# Altium PCB 19-3170105582.PcbDoc (part 1 of 2)
Units mil, origin at the board's own origin, x right, y up, seen from the top; angles counter-clockwise.
Board outline 8600 x 7000 mil, 2 copper layers (Top Layer, Bottom Layer); 186 components, 221 nets, 859 pads, 233 vias.
Unrouted connection lines stored in the file: 26.
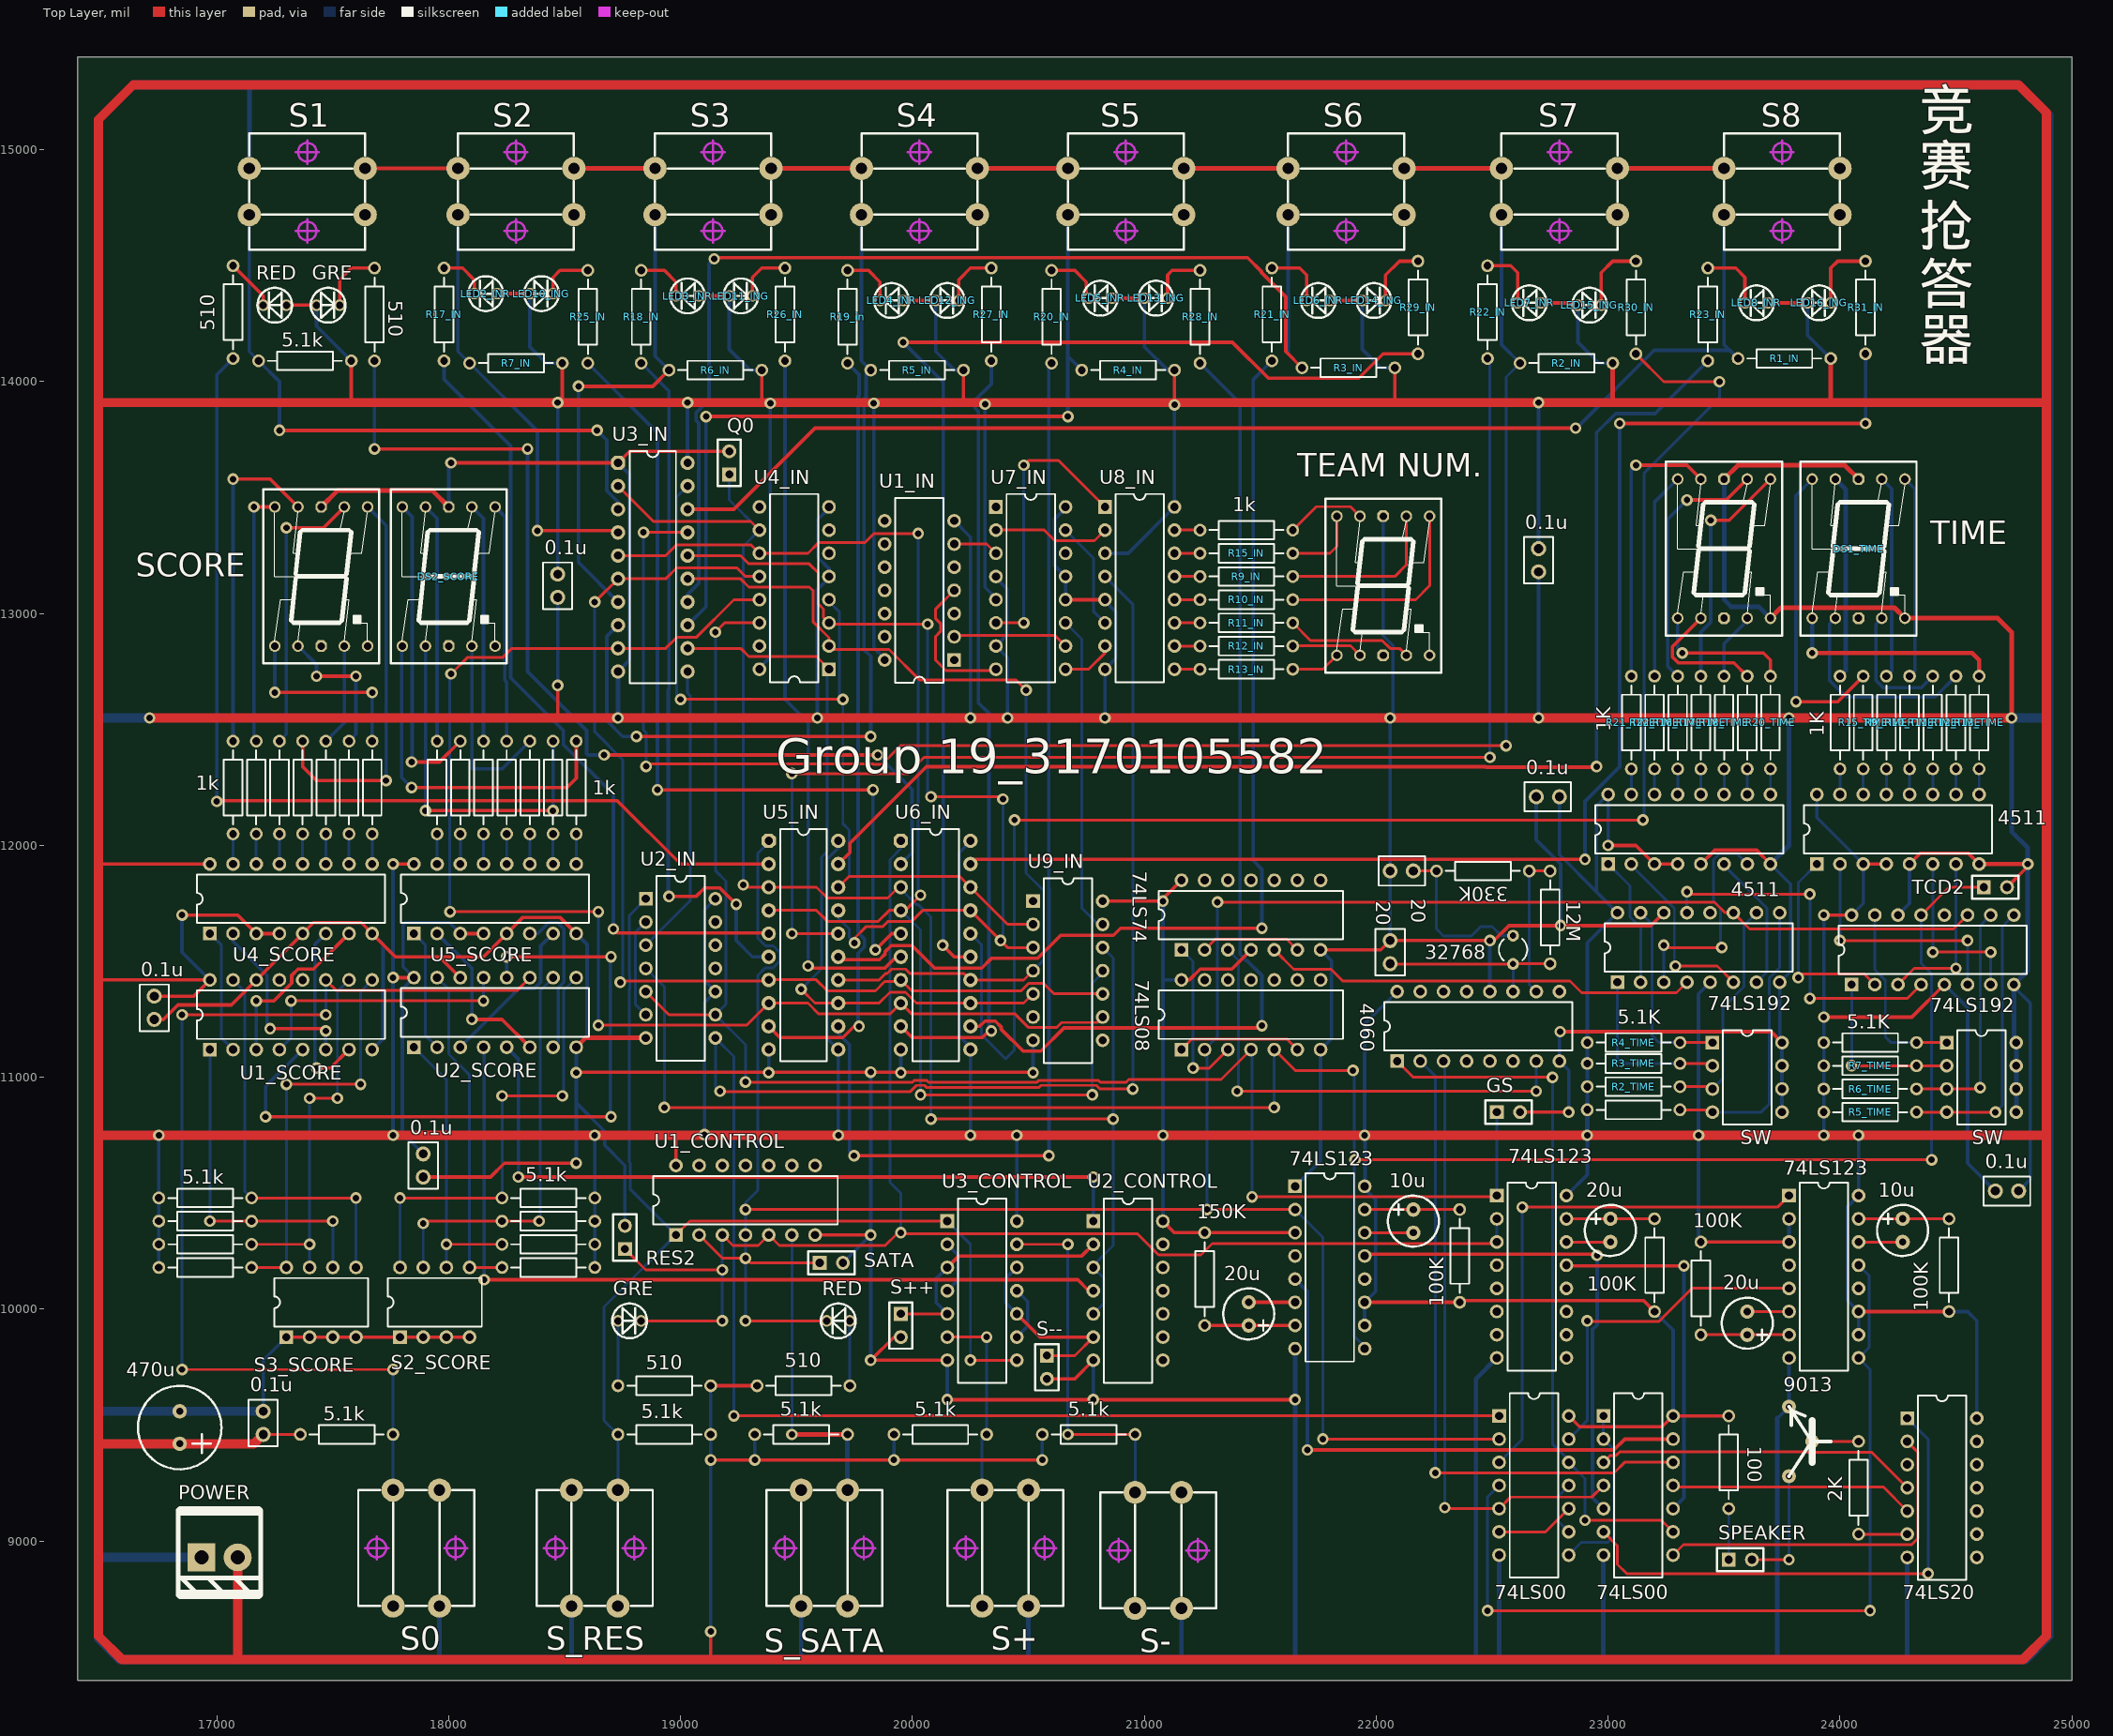
[diagram p0: Top Layer view]
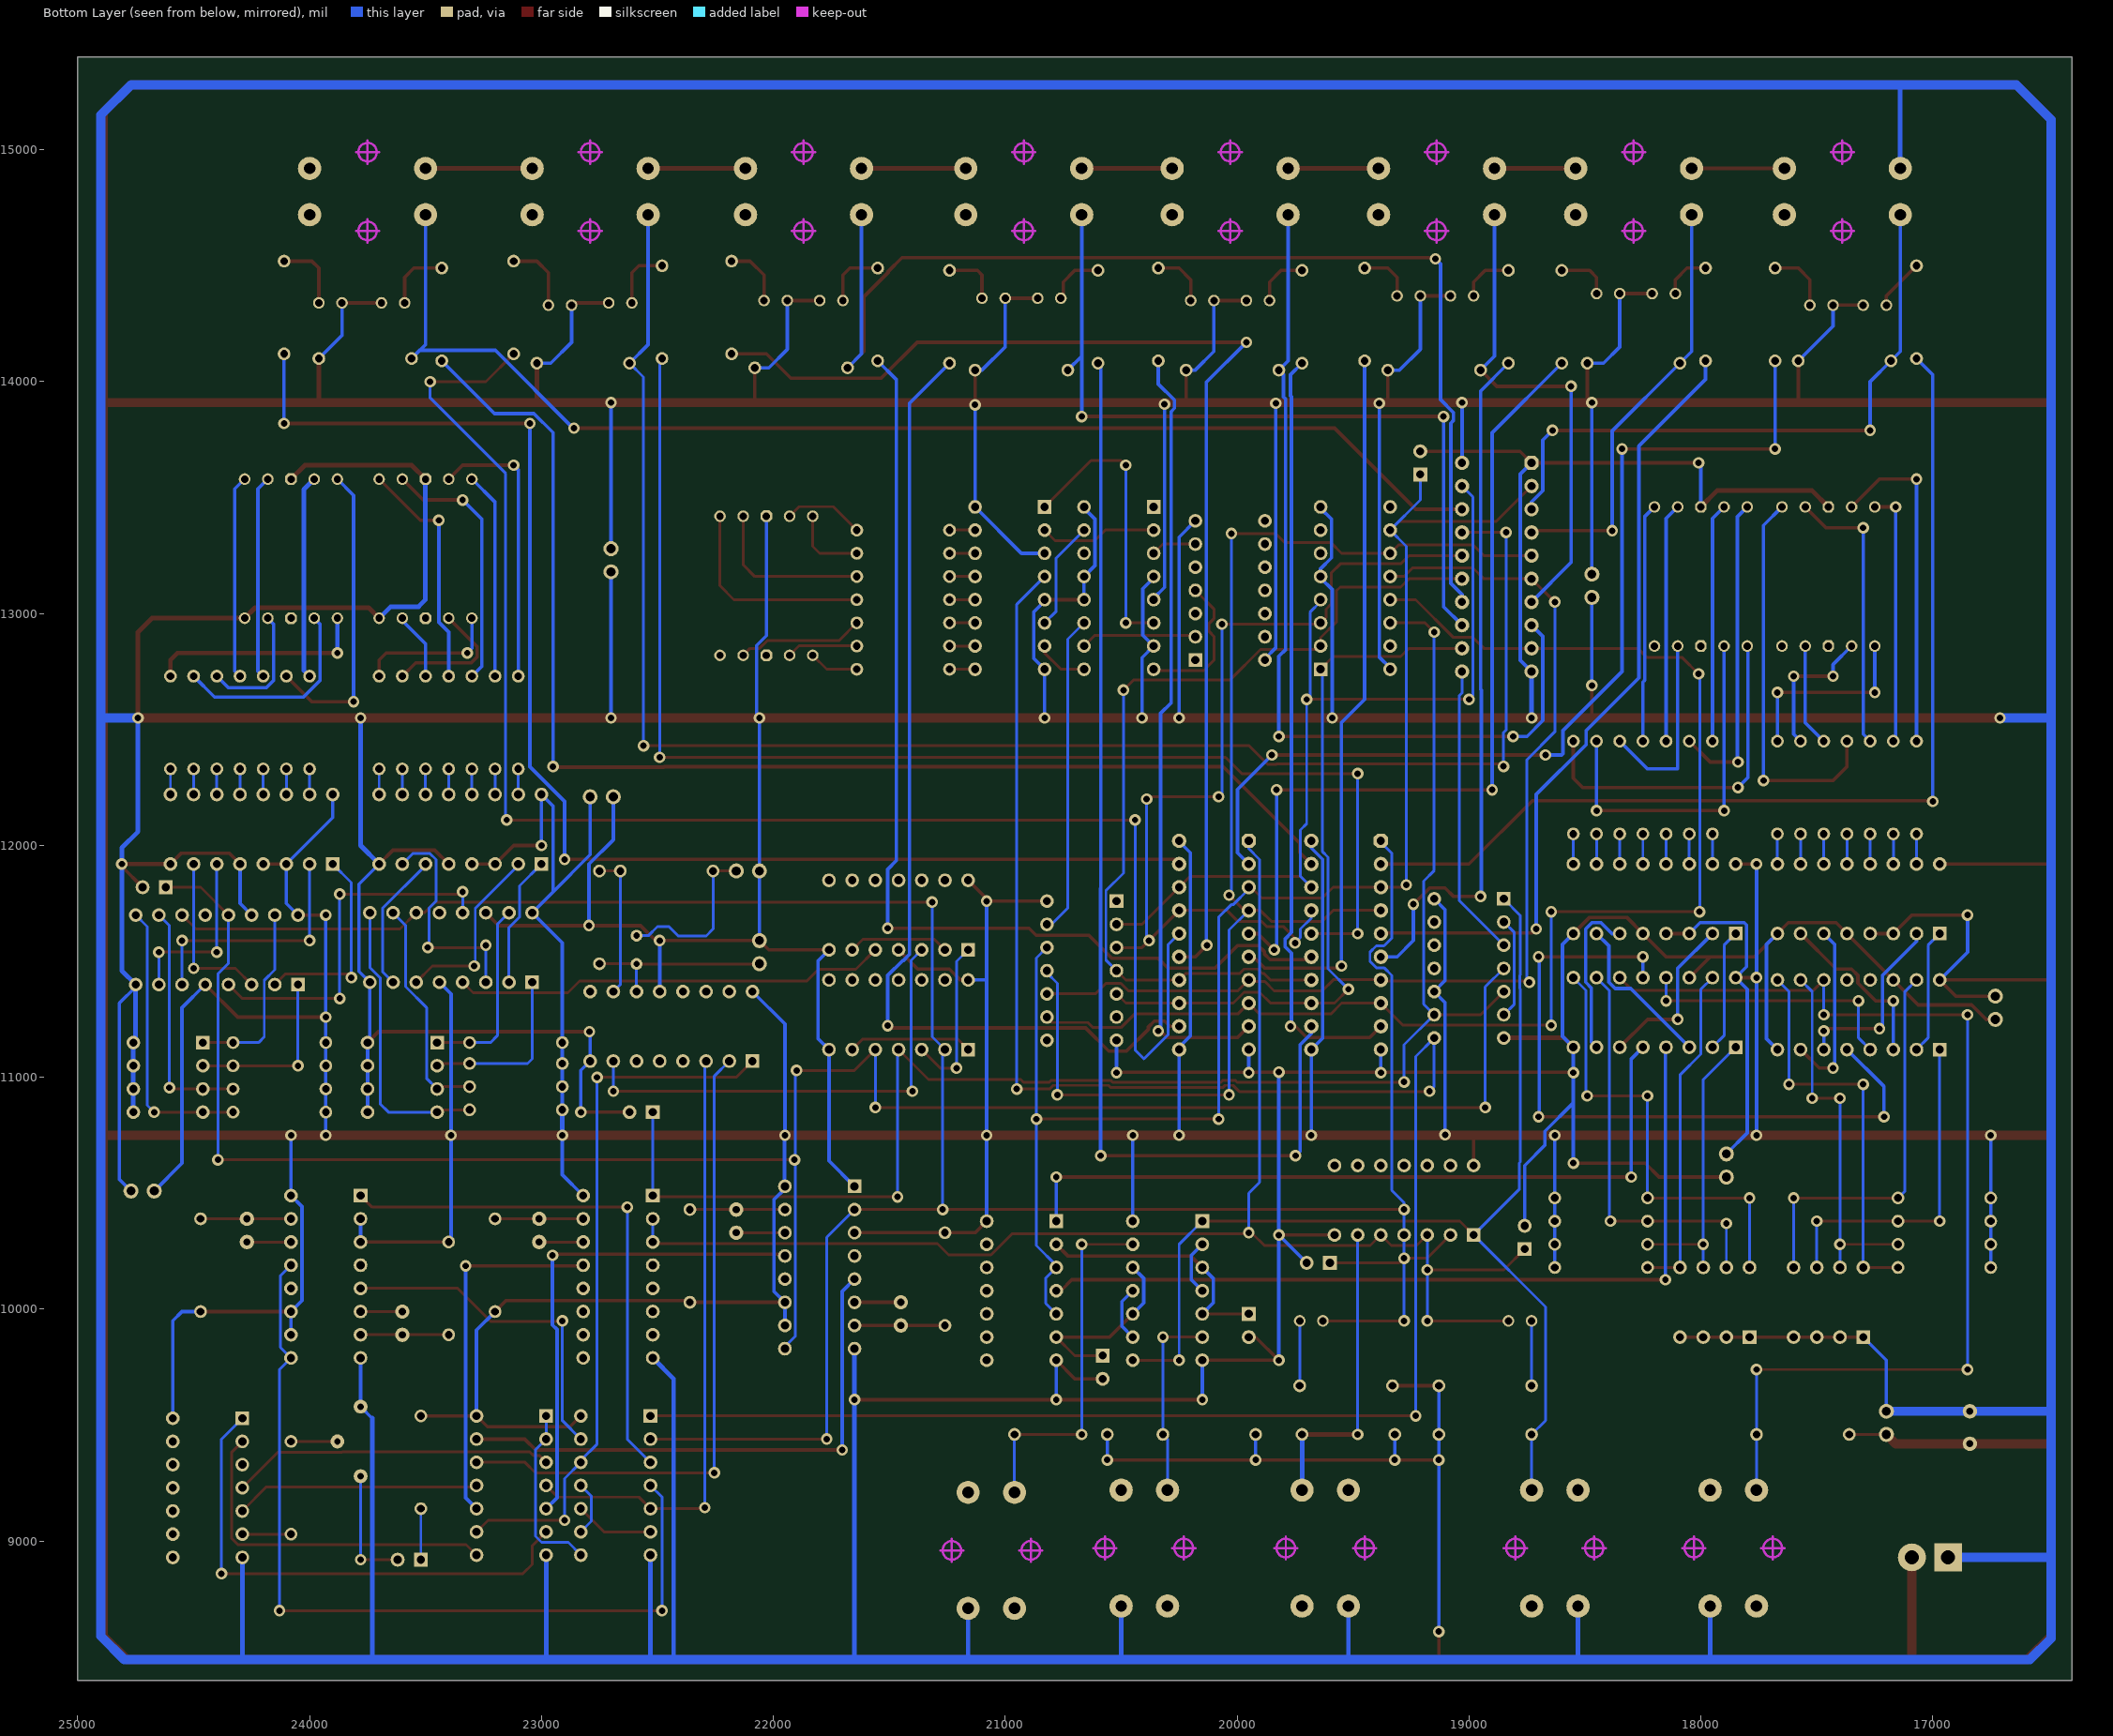
[diagram p1: Bottom Layer view, seen from below]

## Layer stack, top to bottom
Top Layer: signal copper 1.4
Dielectric: dielectric 12.6, FR-4, Dk 4.8
Bottom Layer: signal copper 1.4

## Board outline
16400,15400 25000,15400 25000,8400 16400,8400

## Design rules (kind name [scope] priority, off if disabled: settings)
Clearance [All] p1: gap=10
PolygonConnect [All] p1: connectstyle=Relief reliefconductorwidth=10 reliefentries=4 polygonreliefangle="90 Angle"
RoomDefinition Sheet1 [InComponentClass('Sheet1')] p1: confinementstyle=ConfineIn formatcopy=TRUE lockcomponents=FALSE outline 49640,960 50260,960 50260,1890 49640,1890
RoutingCorners [All] p1: cornerstyle=45-Degree minsetback=30 maxsetback=50
RoutingVias [All] p1: holewidth=28 width=50 viastyle="Through Hole" minholewidth=28 minwidth=50 maxholewidth=28 maxwidth=50
SilkscreenOverComponentPads [All] p1: minsilkscreentomaskgap=10
SolderMaskExpansion [All] p1: expansion=4
TestPointUsage [All] p1: valid=0 allowmultiple=FALSE
Testpoint [All] p1: side=15 testpointundercomponent=TRUE minsize=40 maxsize=100 preferedsize=60 minholesize=0 maxholesize=40 preferedholesize=32 testpointgrid=1 style=1023 order=0123456789
Width [All] p1: maxlimit=200 minlimit=10 preferedwidth=12
22 further rules are at their usual default settings.

## Classes and differential pairs
component class Sheet1: 0.1u 5.1K 5.1k 10u 20 20u 100 100K 150K 470u 510 9013 DS1_TIME DS2_SCORE GRE LED2_INR LED3_INR LED4_INR LED5_INR LED6_INR LED7_INR LED8_INR LED10_ING LED11_ING LED12_ING LED13_ING LED14_ING LED15_ING LED16_ING POWER R1_IN R2_IN R2_TIME R3_IN R3_TIME R4_IN R4_TIME R5_IN R5_TIME R6_IN RED SCORE "Team num." TIME

## Components (designator, comment, footprint, x,y, rotation, side; value= is the part's Value field where it differs from the comment)
0.1u "Cap" VP32-3.2 17200,9510 r270 top (schematic designator C1_POWER)
0.1u "Cap" VP32-3.2 16730,11300 r90 top (schematic designator C1_POWER)
0.1u "Cap" VP32-3.2 17890,10620 r270 top (schematic designator C1_POWER)
0.1u "Cap" VP32-3.2 24720,10510 r0 top (schematic designator C1_POWER)
0.1u "Cap" VP32-3.2 22740,12210 r0 top (schematic designator C1_POWER)
0.1u "Cap" VP32-3.2 22700,13230 r90 top (schematic designator C1_POWER)
0.1u "Cap" VP32-3.2 18470,13120 r90 top (schematic designator C1_POWER)
1k "RES1" AXIAL-0.4 17950,12250 r90 top (schematic designator R25_SCORE)
1k "RES1" AXIAL-0.4 17070,12250 r90 top (schematic designator R18_SCORE)
1k "R" AXIAL-0.4 21440,13360 r0 top (schematic designator R14_IN)
1K "Res2" AXIAL-0.4 24000,12530 r90 top (schematic designator R14_TIME)
1K "Res2" AXIAL-0.4 23600,12530 r90 top (schematic designator R19_TIME)
2K "Res2" AXIAL-0.4 24080,9230 r90 top (schematic designator R7_ALARM)
5.1k "RES1" AXIAL-0.4 16950,10480 r180 top (schematic designator R12_SCORE)
5.1k "RES1" AXIAL-0.4 20760,9460 r0 top (schematic designator R6_CONTROL)
5.1k "RES1" AXIAL-0.4 18430,10480 r0 top (schematic designator R5_SCORE)
5.1k "RES1" AXIAL-0.4 20120,9460 r0 top (schematic designator R5_CONTROL)
5.1k "RES1" AXIAL-0.4 19520,9460 r0 top (schematic designator R4_CONTROL)
5.1k "RES1" AXIAL-0.4 18930,9460 r180 top (schematic designator R3_CONTROL)
5.1k "Res2" AXIAL-0.4 17560,9460 r0 top (schematic designator R0)
5.1K "Res2" AXIAL-0.4 23110,10860 r180 top (schematic designator R1_TIME)
5.1k "R" AXIAL-0.4 17380,14090 r0 top (schematic designator R8_IN)
5.1K "Res2" AXIAL-0.4 24130,11150 r180 top (schematic designator R8_TIME)
10u "Cap Pol1" RB.2/.1 24270,10390 r270 top (schematic designator C1_ALARM)
10u "Cap Pol1" RB.2/.1 22160,10430 r270 top (schematic designator C3)
12M "Res2" AXIAL-0.4 22750,11690 r90 top (schematic designator R23_TIME)
20 "Cap" VP32-3.2 22110,11890 r180 top (schematic designator C1_TIME)
20 "Cap" VP32-3.2 22060,11540 r90 top (schematic designator C2_TIME)
20u "Cap Pol1" RB.2/.1 23600,9890 r90 top (schematic designator C2_ALARM)
20u "Cap Pol1" RB.2/.1 23010,10390 r270 top (schematic designator C4)
20u "Cap Pol1" RB.2/.1 21450,9930 r90 top (schematic designator C5_ALARM)
74LS00 "74LS00" DIP-14 22680,9240 r270 top (schematic designator U1_ALARM)
74LS00 "74LS00" DIP-14 23130,9240 r270 top (schematic designator U2_ALARM)
74LS08 "74LS08" DIP-14 21460,11270 r0 top (schematic designator U6_TIME)
74LS20 "74LS20" DIP-14 24440,9230 r270 top (schematic designator U6_ALARM)
74LS74 "74LS74" DIP-14 21460,11700 r0 top (schematic designator U7_TIME)
74LS123 "74LS123" DIP-16 23930,10140 r270 top (schematic designator U3_ALARM)
74LS123 "74LS123" DIP-16 21800,10180 r270 top (schematic designator U4_ALARM)
74LS123 "74LS123" DIP-16 22670,10140 r270 top (schematic designator U5_ALARM)
74LS192 "74LS192" DIP-16 24400,11550 r0 top (schematic designator U1_TIME)
74LS192 "74LS192" DIP-16 23390,11560 r0 top (schematic designator U3_TIME)
100 "Res2" AXIAL-0.4 23520,9340 r90 top (schematic designator R6_ALARM)
100K "Res2" AXIAL-0.4 24470,10190 r270 top (schematic designator R1_ALARM)
100K "Res2" AXIAL-0.4 23400,10090 r90 top (schematic designator R2_ALARM)
100K "Res2" AXIAL-0.4 22360,10230 r270 top (schematic designator R3_ALARM)
100K "Res2" AXIAL-0.4 23200,10190 r270 top (schematic designator R4_ALARM)
150K "Res2" AXIAL-0.4 21260,10130 r270 top (schematic designator R5_ALARM)
330K "Res2" AXIAL-0.4 22460,11890 r180 top (schematic designator R24_TIME)
470u "Cap Pol1" RB.4/.14(220U) 16840,9420 r90 top (schematic designator C2_POWER)
510 "RES1" AXIAL-0.4 19530,9670 r0 top (schematic designator R2_CONTROL)
510 "RES1" AXIAL-0.4 18930,9670 r180 top (schematic designator R1_CONTROL)
510 "R" AXIAL-0.4 17070,14300 r90 top (schematic designator R16_IN)
510 "R" AXIAL-0.4 17680,14290 r90 top (schematic designator R24_IN)
4060 "4060" DIP-16 22440,11220 r0 top (schematic designator U5_TIME)
4511 "4511" DIP-16 24250,12070 r0 top (schematic designator U2_TIME)
4511 "4511" DIP-16 23350,12070 r0 top (schematic designator U4_TIME)
9013 "NPNLXH" NPN-2 23780,9580 r180 top (schematic designator Q1_ALARM)
32768 "XTAL" R38 22590,11550 r180 top (schematic designator Y1_TIME)
DS1_TIME "DSY" 8-.5 24080,13580 r0 top
DS2_SCORE "DSY" 8-.5 18000,13460 r0 top
GRE "Component_1" LEDLXH-3 17430,14330 r90 top (schematic designator LED9_ING)
GRE "Component_1" LEDLXH-3 18730,9950 r90 top (schematic designator LEDGREEN_CONTROL)
GS "Comment" SIP-2 22520,10850 r0 top
LED2_INR "Component_1" LEDLXH-3 18210,14380 r270 top
LED3_INR "Component_1" LEDLXH-3 19080,14370 r270 top
LED4_INR "Component_1" LEDLXH-3 19960,14350 r270 top
LED5_INR "Component_1" LEDLXH-3 20860,14360 r270 top
LED6_INR "Component_1" LEDLXH-3 21800,14350 r270 top
LED7_INR "Component_1" LEDLXH-3 22710,14340 r270 top
LED8_INR "Component_1" LEDLXH-3 23690,14340 r270 top
LED10_ING "Component_1" LEDLXH-3 18350,14380 r90 top
LED11_ING "Component_1" LEDLXH-3 19210,14370 r90 top
LED12_ING "Component_1" LEDLXH-3 20100,14350 r90 top
LED13_ING "Component_1" LEDLXH-3 21000,14360 r90 top
LED14_ING "Component_1" LEDLXH-3 21940,14350 r90 top
LED15_ING "Component_1" LEDLXH-3 22870,14330 r90 top
LED16_ING "Component_1" LEDLXH-3 23860,14340 r90 top
POWER "5-12V" "POWER PLUG2" 16934,8930 r180 top
Q0 "Comment" SIP-2 19210,13600 r90 top
R1_IN "R" AXIAL-0.4 23760,14100 r0 top
R2_IN "R" AXIAL-0.4 22820,14080 r0 top
R2_TIME "Res2" AXIAL-0.4 23110,10960 r180 top
R3_IN "R" AXIAL-0.4 21880,14060 r0 top
R3_TIME "Res2" AXIAL-0.4 23110,11060 r180 top
R4_IN "R" AXIAL-0.4 20930,14050 r0 top
R4_TIME "Res2" AXIAL-0.4 23110,11150 r180 top
R5_IN "R" AXIAL-0.4 20020,14050 r0 top
R5_TIME "Res2" AXIAL-0.4 24130,10850 r180 top
R6_IN "R" AXIAL-0.4 19150,14050 r0 top
R6_SCORE "RES1" AXIAL-0.4 18430,10380 r0 top
R6_TIME "Res2" AXIAL-0.4 24130,10950 r180 top
R7_IN "R" AXIAL-0.4 18290,14080 r0 top
R7_SCORE "RES1" AXIAL-0.4 18430,10280 r0 top
R7_TIME "Res2" AXIAL-0.4 24130,11050 r180 top
R8_SCORE "RES1" AXIAL-0.4 18430,10180 r0 top
R9_IN "R" AXIAL-0.4 21440,13160 r0 top
R9_SCORE "RES1" AXIAL-0.4 16950,10180 r180 top
R9_TIME "Res2" AXIAL-0.4 24200,12530 r90 top
R10_IN "R" AXIAL-0.4 21440,13060 r0 top
R10_SCORE "RES1" AXIAL-0.4 16950,10280 r180 top
R10_TIME "Res2" AXIAL-0.4 24300,12530 r90 top
R11_IN "R" AXIAL-0.4 21440,12960 r0 top
R11_SCORE "RES1" AXIAL-0.4 16950,10380 r180 top
R11_TIME "Res2" AXIAL-0.4 24400,12530 r90 top
R12_IN "R" AXIAL-0.4 21440,12860 r0 top
R12_TIME "Res2" AXIAL-0.4 24500,12530 r90 top
R13_IN "R" AXIAL-0.4 21440,12760 r0 top
R13_SCORE "RES1" AXIAL-0.4 17270,12250 r90 top
R13_TIME "Res2" AXIAL-0.4 24600,12530 r90 top
R14_SCORE "RES1" AXIAL-0.4 17370,12250 r90 top
R15_IN "R" AXIAL-0.4 21440,13260 r0 top
R15_SCORE "RES1" AXIAL-0.4 17470,12250 r90 top
R15_TIME "Res2" AXIAL-0.4 24100,12530 r90 top
R16_SCORE "RES1" AXIAL-0.4 17570,12250 r90 top
R16_TIME "Res2" AXIAL-0.4 23300,12530 r90 top
R17_IN "R" AXIAL-0.4 17980,14290 r90 top
R17_SCORE "RES1" AXIAL-0.4 17670,12250 r90 top
R17_TIME "Res2" AXIAL-0.4 23400,12530 r90 top
R18_IN "R" AXIAL-0.4 18830,14280 r90 top
R18_TIME "Res2" AXIAL-0.4 23500,12530 r90 top
R19_in "R" AXIAL-0.4 19720,14280 r90 top
R19_SCORE "RES1" AXIAL-0.4 17170,12250 r90 top
R20_IN "R" AXIAL-0.4 20600,14280 r90 top
R20_SCORE "RES1" AXIAL-0.4 18150,12250 r90 top
R20_TIME "Res2" AXIAL-0.4 23700,12530 r90 top
R21_IN "R" AXIAL-0.4 21550,14290 r90 top
R21_SCORE "RES1" AXIAL-0.4 18250,12250 r90 top
R21_TIME "Res2" AXIAL-0.4 23100,12530 r90 top
R22_IN "R" AXIAL-0.4 22480,14300 r90 top
R22_SCORE "RES1" AXIAL-0.4 18350,12250 r90 top
R22_TIME "Res2" AXIAL-0.4 23200,12530 r90 top
R23_IN "R" AXIAL-0.4 23430,14290 r90 top
R23_SCORE "RES1" AXIAL-0.4 18450,12250 r90 top
R24_SCORE "RES1" AXIAL-0.4 18550,12250 r90 top
R25_IN "R" AXIAL-0.4 18600,14280 r90 top
R26_IN "R" AXIAL-0.4 19450,14290 r90 top
R26_SCORE "RES1" AXIAL-0.4 18050,12250 r90 top
R27_IN "R" AXIAL-0.4 20340,14290 r90 top
R28_IN "R" AXIAL-0.4 21240,14280 r90 top
R29_IN "R" AXIAL-0.4 22180,14320 r90 top
R30_IN "R" AXIAL-0.4 23120,14320 r90 top
R31_IN "R" AXIAL-0.4 24110,14320 r90 top
RED "Component_1" LEDLXH-3 17300,14330 r270 top (schematic designator LED1_INR)
RED "Component_1" LEDLXH-3 19730,9950 r270 top (schematic designator LEDRED_CONTROL)
RES2 "Comment" SIP-2 18760,10260 r90 top
S0 "SW-PB" AN-L 17760,8720 r90 top
S1 "SW-PB" AN-L 17140,14920 r0 top
S2 "SW-PB" AN-L 18040,14920 r0 top
S2_SCORE "SW-DIP4" DIP-8 17940,10030 r0 top
S3 "SW-PB" AN-L 18890,14920 r0 top
S3_SCORE "SW-DIP4" DIP-8 17450,10030 r0 top
S4 "SW-PB" AN-L 19780,14920 r0 top
S5 "SW-PB" AN-L 20670,14920 r0 top
S6 "SW-PB" AN-L 21620,14920 r0 top
S7 "SW-PB" AN-L 22540,14920 r0 top
S8 "SW-PB" AN-L 23500,14920 r0 top
S+ "SW-PB" AN-L 20300,8720 r90 top
S++ "Comment" SIP-2 19950,9980 r270 top
S- "SW-PB" AN-L 20960,8710 r90 top
S-- "Comment" SIP-2 20580,9800 r270 top
S_RES "SW-PB" AN-L 18530,8720 r90 top
S_SATA "SW-PB" AN-L 19520,8720 r90 top
SATA "Comment" SIP-2 19600,10200 r0 top
SCORE "DSY" 8-.5 17450,13460 r0 top (schematic designator DS1_SCORE)
SPEAKER "BUZZER" SIP-2 23520,8920 r0 top
SW "SW-DIP4" DIP-8 24610,11000 r270 top (schematic designator S1_TIME)
SW "SW-DIP4" DIP-8 23600,11000 r270 top (schematic designator S2_TIME)
TCD2 "Comment" SIP-2 24620,11820 r0 top
"TEAM NUM." "DSY" 8-.5 22030,13420 r0 top (schematic designator DS1_IN)
TIME "DSY" 8-.5 23500,13580 r0 top (schematic designator DS2_TIME)
U1_CONTROL "4011" DIP-14 19280,10470 r0 top
U1_IN "74LS04" DIP-14 20030,13100 r90 top
U1_SCORE "74LS192" DIP-16 17320,11270 r0 top
U2_CONTROL "74LS02" DIP-14 20930,10080 r270 top
U2_IN "74LS00" DIP-14 19000,11470 r270 top
U2_SCORE "74LS192" DIP-16 18200,11280 r0 top
U3_CONTROL "4011" DIP-14 20300,10080 r270 top
U3_IN "74LS373" DIP-20 18730,13650 r0 top
U4_IN "74LS148" DIP-16 19490,13110 r90 top
U4_SCORE "4511" DIP-16 17320,11770 r0 top
U5_IN "74LS373" DIP-20 19380,12020 r0 top
U5_SCORE "4511" DIP-16 18200,11770 r0 top
U6_IN "74LS373" DIP-20 19950,12020 r0 top
U7_IN "74LS83" DIP-16 20510,13110 r270 top
U8_IN "4511" DIP-16 20980,13110 r270 top
U9_IN "4068" DIP-14 20670,11460 r270 top

## Footprints (in the part's own frame and the unit in brackets; to place one, negate y for a bottom-side part, rotate by r counter-clockwise, add the part's x,y. Pads: shape width x height; smd on the part's side, far side on the other; paste and mask are expansions set on the pad)
8-.5 [mil]
  round 50 hole 32: 1(100,0) 2(200,0) 3(100,-600) 4(-100,-600) 5(-200,-600) 6(-100,0) 7(-200,0) 8(200,-600)
  oct 50x50 hole 32: 9(0,0) 10(0,-600)
  silkscreen extent -250,-675 250,75
AN-L [mil]
  round 100 hole 50: 1(0,0) 1(500,0) 2(0,-200) 2(500,-200)
  Keep-Out Layer circle w10: c250,70 r40
  Keep-Out Layer circle w10: c250,-270 r40
  Keep-Out Layer lines w10: 250,120 250,20 ; 200,70 300,70 ; 250,-220 250,-320 ; 200,-270 300,-270
  silkscreen extent 0,-350 500,150
AXIAL-0.4 [mm] "Resistor; 2 Leads"
  round 1.4 hole 0.85: 1(-5.08,0) 2(5.08,0)
  silkscreen extent -4.06,-1.02 4.06,1.02
DIP-8 [mm] "DIP; 8 Leads; Row Spacing 7.62 mm; Pitch 2.54 mm"
  rect 1.5x1.5 hole 0.9: 1(-3.81,-3.81)
  round 1.5 hole 0.9: 2(-1.27,-3.81) 3(1.27,-3.81) 4(3.81,-3.81) 5(3.81,3.81) 6(1.27,3.81) 7(-1.27,3.81) 8(-3.81,3.81)
  silkscreen extent -5.15,-2.65 5.15,2.65
DIP-14 [mm] "DIP; 14 Leads; Row Spacing 7.62 mm; Pitch 2.54 mm"
  rect 1.5x1.5 hole 0.9: 1(-7.62,-3.81)
  round 1.5 hole 0.9: 2(-5.08,-3.81) 3(-2.54,-3.81) 4(0,-3.81) 5(2.54,-3.81) 6(5.08,-3.81) 7(7.62,-3.81) 8(7.62,3.81) 9(5.08,3.81) 10(2.54,3.81) 11(0,3.81) 12(-2.54,3.81) 13(-5.08,3.81) 14(-7.62,3.81)
  silkscreen extent -10.1,-2.65 10.1,2.65
DIP-16 [mm] "DIP; 16 Leads; Row Spacing 7.62 mm; Pitch 2.54 mm"
  rect 1.5x1.5 hole 0.9: 1(-8.89,-3.81)
  round 1.5 hole 0.9: 2(-6.35,-3.81) 3(-3.81,-3.81) 4(-1.27,-3.81) 5(1.27,-3.81) 6(3.81,-3.81) 7(6.35,-3.81) 8(8.89,-3.81) 9(8.89,3.81) 10(6.35,3.81) 11(3.81,3.81) 12(1.27,3.81) 13(-1.27,3.81) 14(-3.81,3.81) 15(-6.35,3.81) 16(-8.89,3.81)
  silkscreen extent -10.3,-2.65 10.3,2.65
DIP-20 [mil]
  oct 62x62 hole 35: 1(0,0)
  round 62 hole 35: 2(0,-100) 3(0,-200) 4(0,-300) 5(0,-400) 6(0,-500) 7(0,-600) 8(0,-700) 9(0,-800) 10(0,-900) 11(300,-900) 12(300,-800) 13(300,-700) 14(300,-600) 15(300,-500) 16(300,-400) 17(300,-300) 18(300,-200) 19(300,-100) 20(300,0)
  silkscreen extent 50,-950 250,50
LEDLXH-3 [mil]
  round 50 hole 32: 1(0,0) 2(0,-100)
  silkscreen extent -75,-125 75,25
NPN-2 [mil]
  round 60 hole 28: 1(0,0) 2(-100,150) 3(0,300)
  silkscreen extent -180,0 0,300
"POWER PLUG2" [mil]
  rect 120x120 hole 60: 1(0,0)
  round 120 hole 60: 2(-156,0)
  silkscreen extent -255,-204 100,164
R38 [mm] "Crystal, Thru-Hole; 2 Leads; Body 3.1 x 8.2 mm (Dia.xH)"
  round 1.3 hole 0.7: 1(0,1.55) 2(0,-1.55)
  silkscreen extent -1.55,-1.19 1.55,1.17
RB.2/.1 [mil]
  round 62 hole 31: 1(0,0) 2(100,0)
  silkscreen extent -60,-110 160,110
RB.4/.14(220U) [mil]
  round 62 hole 31: 1(0,0) 2(140,0)
  silkscreen extent -110,-180 250,180
SIP-2 [mil]
  rect 60x60 hole 35: 1(0,0)
  round 60 hole 35: 2(100,0)
  silkscreen extent -50,-50 150,50
VP32-3.2 [mm] "Capacitor, Ceramic, Thru-Hole, Dipped Radial; Body 5.1 x 3.2 mm (WxT) Pin Spacing 2.54 mm (typ)"
  round 1.65 hole 1: 1(-1.27,0) 2(1.27,0)
  silkscreen extent -2.55,-1.6 2.55,1.6

## Part data
0.1u 0.1u 0.1u 0.1u 0.1u 0.1u 0.1u 20 20: "Capacitor"
1k 5.1k 510 510 R1_IN R2_IN R3_IN R4_IN R5_IN R6_IN R7_IN R9_IN R10_IN R11_IN R12_IN R13_IN R15_IN R17_IN R18_IN R19_in R20_IN R21_IN R22_IN R23_IN R25_IN R26_IN R27_IN R28_IN R29_IN R30_IN R31_IN: library part Res2, "Resistor"
1K 1K 2K 5.1k 5.1K 5.1K 12M 100 100K 100K 100K 100K 150K 330K R2_TIME R3_TIME R4_TIME R5_TIME R6_TIME R7_TIME R9_TIME R10_TIME R11_TIME R12_TIME R13_TIME R15_TIME R16_TIME R17_TIME R18_TIME R20_TIME R21_TIME R22_TIME: "Resistor"
10u 10u 20u 20u 20u 470u: "Polarized Capacitor (Radial)"
9013: "NPN Transistor"
32768: "Crystal Oscillator"
DS2_SCORE SCORE: library part DPY_7-SEG, "Seven-Segment Display"
POWER: library part "HEADER 2"
S1 S2 S3 S4 S5 S6 S7 S8: "微动开关"
SPEAKER: library part Cap, "Capacitor"
U2_CONTROL: library part 74LS32

## Via types
v1: diameter 50, hole 28, Top Layer to Bottom Layer, 233 vias

## Nets (pads, with @x,y where several pads share a name; then routed paths per layer and width w, separated by ;. In a path a pad name is that pad's centre, name@x,y a point inside that pad or via, vN(x,y) a via of type N, cw(c..) or ccw(c..) an arc to the next point about the centre after c; other vN are vias at no path point)
1KHZ: 74LS00.12@23280,9340 4060.2 | length 2846.6
  Top Layer w12: v1(22254.47,9294.47) 23025.53,9294.47 23071.06,9340 74LS00.12@23280,9340
  Bottom Layer w12: 4060.2@22190,11070 22254.47,11005.53 v1(22254.47,9294.47)
2KHZ: 74LS00.4@22980,9240 74LS00.5@22530,9140 4060.3 | length 2655.6
  Top Layer w12: v1(22295.47,9144.53) 22300,9140 74LS00.5@22530,9140 22580,9190 22930,9190 74LS00.4@22980,9240
  Bottom Layer w12: 4060.3@22290,11070 22295.47,11064.53 v1(22295.47,9144.53)
512HZ: 74LS00.9@23280,9040 74LS00.12@22830,9340 4060.1 | length 3067.7
  Top Layer w12: 4060.1@22090,11070 22160,11000 v1(22760,11000) ; v1(22900,9090) 23230,9090 74LS00.9@23280,9040
  Bottom Layer w12: v1(22760,11000) 22760,9418.94 22830,9348.94 74LS00.12@22830,9340 22900,9270 v1(22900,9090)
AL1: 74LS00.3@22980,9340 74LS20.4 | length 1393.3
  Top Layer w12: 74LS00.3@22980,9340 23009.47,9369.47 23034.47,9369.47 23050.53,9385.53 23859.42,9385.53 23860.95,9384 24136,9384 74LS20.4@24290,9230
AL3: 74LS00.11@23280,9240 74LS20.5 | length 1055.6
  Top Layer w12: 74LS00.11@23280,9240 23286,9234 24186,9234 74LS20.5@24290,9130
BI: 74LS00.1@22530,9540 U2_IN.8 U8_IN.4 | length 9265.9
  Top Layer w12: v1(19170,10940) 19171,10939 19991.02,10939 20017.49,10965.47 20051.46,10965.47 20059.93,10957 20546.1,10957 20554.57,10965.47 20792.51,10965.47 20807.98,10950 v1(20950,10950) ; v1(19230,9540) 74LS00.1@22530,9540
  Bottom Layer w12: v1(19170,10940) 19150,10960 U2_IN.8@19150,11170 19230,11090 v1(19230,9540) ; U8_IN.4@20830,13160 20950,13040 v1(20950,10950)
CLEAR: 5.1k.2@17760,9460 S0.1 U1_SCORE.11 U2_SCORE.11 | length 4654.7
  Top Layer w12: v1(16850,9740) v1(17760,9740) ; v1(16850,11270) v1(17470,11270) ; U1_SCORE.11@17470,11420 17515.53,11374.47 18294.47,11374.47 U2_SCORE.11@18350,11430
  Bottom Layer w12: v1(16850,9740) v1(16850,11270) ; v1(17470,11270) U1_SCORE.11@17470,11420 ; S0.1@17760,8720 S0.1@17761,8721 ; v1(17760,9740) 5.1k.2@17760,9460 S0.1@17760,9220 S0.1@17761,9219
GND: 0.1u.1@16730,11250 0.1u.1@17200,9560 0.1u.1@18470,13070 0.1u.1@22690,12210 0.1u.1@22700,13180 0.1u.2@17890,10570 0.1u.2@24770,10510 20.2 74LS00.7 74LS08.7 74LS20.7 74LS74.7 74LS123.1@21650,10530 74LS123.8 74LS192.8 74LS192.14 470u.2 4060.8 4060.12 4511.5 4511.8 9013.1 "TEAM NUM..9" DS1_TIME.8 DS1_TIME.9 DS2_SCORE.9 GS.2 POWER.1 Q0.2 RES2.2 S0.2 S1.1 S2.1 S2_SCORE.1 S2_SCORE.2 S2_SCORE.3 S2_SCORE.4 S3.1 S3_SCORE.1 S3_SCORE.2 S3_SCORE.3 S3_SCORE.4 S4.1 S5.1 S6.1 S7.1 S8.1 S++.2 S+.2 S--.2 S-.2 S_RES.1 S_SATA.1 SATA.2 SCORE.9 SW.5 SW.6 SW.7 SW.8 TCD2.2 TIME.8 TIME.9 U1_CONTROL.7 U1_IN.7 U1_SCORE.8 U1_SCORE.14 U2_CONTROL.7 U2_IN.7 U2_SCORE.8 U2_SCORE.14 U3_CONTROL.7 U3_IN.1 U3_IN.10 U4_IN.5 U4_IN.8 U4_SCORE.5 U4_SCORE.8 U5_IN.10 U5_SCORE.5 U5_SCORE.8 U6_IN.10 U7_IN.4 U7_IN.7 U7_IN.12 U7_IN.13 U7_IN.16 U8_IN.5 U8_IN.8 U9_IN.7 | length 86099.2
  Top Layer w15: 0.1u.1@16730,11250 16769.9,11250 16832.4,11312.5 17062.5,11312.5 U1_SCORE.14@17170,11420 U4_SCORE.5@17370,11620 17417.03,11667.03 17622.97,11667.03 U4_SCORE.8@17670,11620 17770,11520 17960,11520 ; S3_SCORE.1@17300,9880 S3_SCORE.2@17400,9880 S3_SCORE.3@17500,9880 S3_SCORE.4@17600,9880 S2_SCORE.1@17790,9880 S2_SCORE.2@17890,9880 S2_SCORE.3@17990,9880 S2_SCORE.4@18090,9880 ; S1.1@17640,14920 S2.1@18040,14920 ; 0.1u.2@17890,10570 18180,10570 18240,10630 v1(18550,10630) ; v1(18010,13650) U3_IN.1@18730,13650 18780,13700 Q0.2@19210,13700 ; U2_SCORE.14@18050,11430 17960,11520 ; 18470,12550 v1(18470,12690) ; v1(18550,11020) 18552.5,11022.5 20517.5,11022.5 v1(20520,11020) ; U5_SCORE.8@18550,11620 18480,11690 18320,11690 U5_SCORE.5@18250,11620 18150,11520 17960,11520 ; U1_CONTROL.7@19580,10320 v1(19820,10320) ; S++.2@19950,9880 19920,9880 v1(19820,9780) U3_CONTROL.7@20150,9780 ; v1(20150,9610) v1(21650,9610) ; S--.2@20580,9700 20700,9700 U2_CONTROL.7@20780,9780 ; U7_IN.12@20660,13060 U8_IN.5@20830,13060 ; 74LS74.7@21760,11550 22020,11550 20.2@22060,11590 22508.04,11590 22572.15,11654.11 23184.11,11654.11 74LS192.14@23240,11710 ; GS.2@22620,10850 v1(22830,10850) ; v1(22792.97,11197.03) 22893.3,11197.03 23527.03,11197.03 23702.97,11197.03 SW.8@23750,11150 ; v1(22795.06,11654.94) v1@22800,11650 ; 4511.5@23400,11920 23460,11980 23640,11980 4511.8@23700,11920 ; 4511.5@24300,11920 24347.03,11967.03 24552.97,11967.03 4511.8@24600,11920 ; TCD2.2@24720,11820 24810,11910 v1(24810,11920)
  Top Layer w20: SCORE.9@17450,13460 17520,13530 17930,13530 DS2_SCORE.9@18000,13460 ; S2.1@18540,14920 S3.1@18890,14920 ; U2_SCORE.8@18550,11130 18590,11170 U2_IN.7@18850,11170 ; S3.1@19390,14920 S4.1@19780,14920 ; S4.1@20280,14920 S5.1@20670,14920 ; S5.1@21170,14920 S6.1@21620,14920 ; S6.1@22120,14920 S7.1@22540,14920 ; S7.1@23040,14920 S8.1@23500,14920 ; TIME.9@23500,13580 23560,13640 24020,13640 DS1_TIME.9@24080,13580 ; TIME.8@23700,12980 23745,13025 24235,13025 DS1_TIME.8@24280,12980 24680,12980 24740,12920 v1(24740,12550) ; 4511.8@24600,11920 v1(24810,11920)
  Top Layer w40: v1(16710,12550) 23770,12550 v1(24740,12550)
  Bottom Layer w15: 0.1u.1@17200,9560 17200,9780 S3_SCORE.1@17300,9880 ; U1_SCORE.8@17670,11120 17717.03,11167.03 17717.03,11572.97 U4_SCORE.8@17670,11620 ; S0.2@17957.5,8722.5 S0.2@17960,8720 ; S0.2@17957.5,9217.5 S0.2@17960,9220 ; DS2_SCORE.9@18000,13460 18000,13640 v1(18010,13650) ; v1(18470,12690) 0.1u.1@18470,13070 ; v1(18550,10630) 18550,10890.1 ; U5_SCORE.8@18550,11620 18597.03,11572.97 18597.03,11177.03 U2_SCORE.8@18550,11130 v1(18550,11020) 18550,10890.1 ; U3_IN.10@18730,12750 18778.5,12798.5 18778.5,13601.5 U3_IN.1@18730,13650 ; RES2.2@18760,10360 18760,10620 18672.5,10707.5 18672.5,10767.6 18550,10890.1 ; v1(19380,11020) U5_IN.10@19380,11120 ; v1(19590,12550) 19590,13104.06 19640,13154.06 U4_IN.5@19640,13160 19640,13193.49 19592.97,13240.52 19592.97,13407.03 19640,13454.06 U4_IN.8@19640,13460 ; SATA.2@19700,10200 v1(19820,10320) ; v1(19820,9780) v1(19820,10320) ; v1(19820,11022.5) v1(19820,10320) ; v1(19950,11020) U6_IN.10@19950,11120 ; v1(20150,9610) U3_CONTROL.7@20150,9780 ; U1_IN.7@20180,13400 20250,13330 v1(20250,12550) ; U7_IN.4@20360,13160 20360,13154.06 20407.03,13107.03 20407.03,12907.03 U7_IN.7@20360,12860 20410,12810 v1(20410,12550) ; v1(20520,11020) U9_IN.7@20520,11160 ; U7_IN.12@20660,13060 U7_IN.13@20660,13160 20612.97,13207.03 20612.97,13407.03 20660,13454.06 U7_IN.16@20660,13460 ; v1(20780,9610) U2_CONTROL.7@20780,9780 ; v1(20830,12550) U8_IN.8@20830,12760 20877.03,12807.03 20877.03,13007.03 20830,13054.06 U8_IN.5@20830,13060 ; 74LS123.1@21650,10530 21760,10640 74LS08.7@21760,11120 21807.03,11167.03 21807.03,11502.97 74LS74.7@21760,11550 ; 22030,13420 22030,12905 22072.5,12862.5 22072.5,12562.5 v1(22060,12550) 20.2@22060,11890 20.2@22060,11590 ; 4060.12@22490,11370 v1(22490,11590) ; 0.1u.1@22690,12210 22690,12024.7 22795.06,11919.64 v1(22795.06,11654.94) ; v1(22700,12550) 0.1u.1@22700,13180 ; v1(22792.97,11197.03) 22790,11194.06 4060.8@22790,11070 22830,11030 v1(22830,10850) ; 4511.8@23700,11920 23787.03,11832.97 23787.03,11457.03 74LS192.8@23740,11410 23740,11160 SW.8@23750,11150 SW.5@23750,10850 ; 23730,9530 9013.1@23780,9580 74LS123.8@23780,9790 ; 74LS192.14@24250,11700 24300,11750 4511.5@24300,11920 ; 74LS192.8@24750,11400 24750,11390 24820,11320 24820,10560 0.1u.2@24770,10510
  Bottom Layer w20: S1.1@17140,14920 17140,15280 ; 17960,8490 S0.2@17960,8720 ; 18530,8490 S_RES.1@18530,8720 S_RES.1@18535,8725 ; S_RES.1@18530,9220 S_RES.1@18535,9215 ; v1(18730,12550) U3_IN.10@18730,12750 ; 19520,8490 S_SATA.1@19520,8720 S_SATA.1@19525,8725 ; S_SATA.1@19520,9220 S_SATA.1@19525,9215 ; S+.2@20495,8725 S+.2@20500,8720 20500,8490 ; S+.2@20495,9215 S+.2@20500,9220 ; S-.2@21155,8715 S-.2@21160,8710 21160,8490 ; S-.2@21155,9205 S-.2@21160,9210 ; 21650,8490 74LS123.8@21650,9830 ; 22430,8490 22430,9700 74LS123.8@22520,9790 ; 22530,8490 74LS00.7@22530,8940 ; 22980,8490 74LS00.7@22980,8940 ; TIME.9@23500,13580 23500,13060 23530,13030 23650,13030 TIME.8@23700,12980 ; 4511.8@23700,11920 23780,12000 v1(23780,12550) ; 23730,8490 23730,9530 ; 24290,8490 74LS20.7@24290,8930 ; v1(24740,12550) 24740,12060 24810,11990 24810,11460 74LS192.8@24750,11400 24750,11160 SW.8@24760,11150 SW.5@24760,10850
  Bottom Layer w40: 16490,9560 470u.2@16840,9560 0.1u.1@17200,9560 ; 16490,12550 v1(16710,12550) ; POWER.1@16934,8930 16490,8930 ; v1(24740,12550) 24900,12550 ; 16490,8930 16490,8580 16580,8490 24800,8490 24900,8590 24900,12550 ; 16490,8930 16490,15130 16640,15280 24770,15280 24900,15150 24900,12550
GS: 74LS08.4 74LS123.1@22520,10490 GS.1 U2_IN.5 U2_IN.9 U4_IN.14 | length 6887.6
  Top Layer w12: U2_IN.5@18850,11370 18950,11270 U2_IN.9@19150,11270 ; v1(19150,12920) 19190,12960 U4_IN.14@19340,12960 ; v1(19280,10980) 19281,10979 19999.9,10979 20008.38,10987.47 20060.57,10987.47 20069.04,10979 20536.98,10979 20545.46,10987.47 20801.62,10987.47 20810.1,10979 20921.02,10979 20933.02,10991 21331,10991 74LS08.4@21460,11120 ; v1(21464.47,10484.47) 22514.47,10484.47 74LS123.1@22520,10490
  Bottom Layer w12: v1(19150,12920) 19150,11892.02 19195.53,11846.49 19195.53,11315.53 U2_IN.9@19150,11270 19280,11140 v1(19280,10980) ; 74LS08.4@21460,11120 21464.47,11115.53 v1(21464.47,10484.47) ; 74LS123.1@22520,10490 GS.1@22520,10850
NetC1_ALARM_1: 10u.1@24270,10390 74LS123.15@24080,10390 100K.1@24470,10390 | length 390
  Top Layer w12: 74LS123.15@24080,10390 10u.1@24270,10390 100K.1@24470,10390
NetC1_ALARM_2: 10u.2@24270,10290 74LS123.14@24080,10290 | length 190
  Top Layer w12: 74LS123.14@24080,10290 10u.2@24270,10290
NetC1_TIME_1: 20.1@22160,11890 330K.2 32768.2 | length 725.1
  Top Layer w12: 20.1@22160,11890 330K.2@22260,11890
  Bottom Layer w12: 330K.2@22260,11890 22260,11640 22290,11610 22410,11610 22450,11650 22500,11650 22538.98,11611.02 32768.2@22590,11611.02
NetC2_ALARM_1: 20u.1@23600,9890 74LS123.7@23780,9890 100K.1@23400,9890 | length 380
  Top Layer w12: 100K.1@23400,9890 20u.1@23600,9890 74LS123.7@23780,9890
NetC2_ALARM_2: 20u.2@23600,9990 74LS123.6@23780,9990 | length 180
  Top Layer w12: 20u.2@23600,9990 74LS123.6@23780,9990
NetC2_TIME_1: 12M.1 20.1@22060,11490 4060.11 32768.1 | length 809.8
  Top Layer w12: 20.1@22060,11490 22061.02,11488.98 32768.1@22590,11488.98 22591.02,11490 12M.1@22750,11490
  Bottom Layer w12: 4060.11@22590,11370 32768.1@22590,11488.98
NetC3_1: 10u.1@22160,10430 74LS123.15@21950,10430 100K.1@22360,10430 | length 410
  Top Layer w12: 74LS123.15@21950,10430 10u.1@22160,10430 100K.1@22360,10430
NetC3_2: 10u.2@22160,10330 74LS123.14@21950,10330 | length 210
  Top Layer w12: 74LS123.14@21950,10330 10u.2@22160,10330
NetC4_1: 20u.1@23010,10390 74LS123.15@22820,10390 100K.1@23200,10390 | length 380
  Top Layer w12: 74LS123.15@22820,10390 20u.1@23010,10390 100K.1@23200,10390
NetC4_2: 20u.2@23010,10290 74LS123.14@22820,10290 | length 190
  Top Layer w12: 74LS123.14@22820,10290 20u.2@23010,10290
NetC5_ALARM_1: 20u.1@21450,9930 74LS123.7@21650,9930 150K.2 | length 390
  Top Layer w15: 150K.2@21260,9930 74LS123.7@21650,9930
NetC5_ALARM_2: 20u.2@21450,10030 74LS123.6@21650,10030 | length 200
  Top Layer w15: 20u.2@21450,10030 74LS123.6@21650,10030
NetDS1_IN_1: "TEAM NUM..1" R9_IN.2 | length 720.7
  Top Layer w12: R9_IN.2@21640,13160 22080,13160 22130,13210 22130,13420
NetDS1_IN_2: "TEAM NUM..2" R10_IN.2 | length 914.9
  Top Layer w12: R10_IN.2@21640,13060 22170,13060 22230,13120 22230,13420
NetDS1_IN_3: "TEAM NUM..3" R11_IN.2 | length 548
  Top Layer w12: R11_IN.2@21640,12960 21717,12883 22027.13,12883 22060.13,12850 22100,12850 22130,12820
NetDS1_IN_4: "TEAM NUM..4" R12_IN.2 | length 307.4
  Top Layer w12: R12_IN.2@21640,12860 21641,12861 21889,12861 21930,12820
NetDS1_IN_5: "TEAM NUM..5" R13_IN.2 | length 214.9
  Top Layer w12: R13_IN.2@21640,12760 21770,12760 21830,12820
NetDS1_IN_6: 1k.2@21640,13360 "TEAM NUM..6" | length 348.8
  Top Layer w12: 1k.2@21640,13360 21741,13461 21889,13461 21930,13420
NetDS1_IN_7: "TEAM NUM..7" R15_IN.2 | length 332.4
  Top Layer w12: R15_IN.2@21640,13260 21800,13260 21830,13290 21830,13420
NetDS1_SCORE_1: R13_SCORE.2 SCORE.1 | length 1219.7
  Top Layer w15: v1(17300,13370) 17460,13370 SCORE.1@17550,13460
  Bottom Layer w15: R13_SCORE.2@17270,12450 17300,12480 v1(17300,13370)
NetDS1_SCORE_2: R14_SCORE.2 SCORE.2 | length 1708
  Top Layer w15: R14_SCORE.2@17370,12450 17370,12340 17430,12280 v1(17730,12280)
  Bottom Layer w15: SCORE.2@17650,13460 17730,13380 v1(17730,12280)
NetDS1_SCORE_3: R15_SCORE.2 SCORE.3 | length 443.1
  Bottom Layer w15: R15_SCORE.2@17470,12450 17550,12530 SCORE.3@17550,12860
NetDS1_SCORE_4: R16_SCORE.2 SCORE.4 | length 625.6
  Top Layer w15: v1(17430,12730) v1(17600,12730)
  Bottom Layer w15: SCORE.4@17350,12860 17430,12780 v1(17430,12730) ; R16_SCORE.2@17570,12450 17600,12480 v1(17600,12730)
NetDS1_SCORE_5: R17_SCORE.2 SCORE.5 | length 830
  Top Layer w15: v1(17250,12660) v1(17670,12660)
  Bottom Layer w15: v1(17250,12660) SCORE.5@17250,12860 ; R17_SCORE.2@17670,12450 v1(17670,12660)
NetDS1_SCORE_6: 1k.2@17070,12450 SCORE.6 | length 1459.7
  Top Layer w15: v1(17070,13580) 17230,13580 SCORE.6@17350,13460
  Bottom Layer w15: 1k.2@17070,12450 v1(17070,13580)
NetDS1_SCORE_7: R19_SCORE.2 SCORE.7 | length 1104.1
  Top Layer w15: v1(17160,13460) SCORE.7@17250,13460
  Bottom Layer w15: v1(17160,13460) 17160,12460 R19_SCORE.2@17170,12450
NetDS1_TIME_1: DS1_TIME.1 R9_TIME.2 | length 876.9
  Bottom Layer w15: DS1_TIME.1@24180,13580 24222.5,13537.5 24222.5,12752.5 R9_TIME.2@24200,12730
NetDS1_TIME_2: DS1_TIME.2 R10_TIME.2 | length 876.9
  Bottom Layer w15: DS1_TIME.2@24280,13580 24322.5,13537.5 24322.5,12752.5 R10_TIME.2@24300,12730
NetDS1_TIME_3: DS1_TIME.3 R11_TIME.2 | length 557.8
  Bottom Layer w15: DS1_TIME.3@24180,12980 24154.94,12954.94 24154.94,12711.34 24186.28,12680 24350,12680 R11_TIME.2@24400,12730
NetDS1_TIME_4: DS1_TIME.4 R12_TIME.2 | length 890.9
  Bottom Layer w15: DS1_TIME.4@23980,12980 23954.94,12954.94 23954.94,12711.34 24026.28,12640 24410,12640 R12_TIME.2@24500,12730
NetDS1_TIME_5: DS1_TIME.5 R13_TIME.2 | length 952.4
  Top Layer w20: v1(23880,12830) 24570,12830 24600,12800 R13_TIME.2@24600,12730
  Bottom Layer w20: v1(23880,12830) DS1_TIME.5@23880,12980
NetDS1_TIME_6: 1K.2@24000,12730 DS1_TIME.6 | length 879
  Bottom Layer w20: DS1_TIME.6@23980,13580 24025,13535 24025,12755 1K.2@24000,12730
NetDS1_TIME_7: DS1_TIME.7 R15_TIME.2 | length 1324.6
  Top Layer w15: v1(23810,12620) 23990,12620 R15_TIME.2@24100,12730
  Bottom Layer w15: v1(23810,12620) 23810,13510 DS1_TIME.7@23880,13580
NetDS2_SCORE_1: DS2_SCORE.1 R20_SCORE.2 | length 1030.7
  Bottom Layer w15: DS2_SCORE.1@18100,13460 18150,13410 R20_SCORE.2@18150,12450
NetDS2_SCORE_2: DS2_SCORE.2 R21_SCORE.2 | length 1030.7
  Bottom Layer w15: DS2_SCORE.2@18200,13460 18242.5,13417.5 18242.5,12712.26 18250,12704.76 R21_SCORE.2@18250,12450
NetDS2_SCORE_3: DS2_SCORE.3 R22_SCORE.2 | length 829.7
  Bottom Layer w15: DS2_SCORE.3@18100,12860 18100,12330 18230,12330 R22_SCORE.2@18350,12450
NetDS2_SCORE_4: DS2_SCORE.4 R23_SCORE.2 | length 1560
  Top Layer w15: v1(17900,12150) v1(18450,12150)
  Bottom Layer w15: v1(17900,12150) 17900,12170 DS2_SCORE.4@17900,12860 ; v1(18450,12150) 18450,12170 R23_SCORE.2@18450,12450
NetDS2_SCORE_5: DS2_SCORE.5 R24_SCORE.2 | length 1515.2
  Top Layer w15: v1(17840,12250) 18510,12250 18550,12290 R24_SCORE.2@18550,12450
  Bottom Layer w15: DS2_SCORE.5@17800,12860 17797.5,12857.5 17797.5,12292.5 v1(17840,12250)
NetDS2_SCORE_6: 1k.2@17950,12450 DS2_SCORE.6 | length 1030.7
  Bottom Layer w15: DS2_SCORE.6@17900,13460 17950,13410 1k.2@17950,12450
NetDS2_SCORE_7: DS2_SCORE.7 R26_SCORE.2 | length 1365.9
  Top Layer w15: v1(17840,12360) 17960,12360 R26_SCORE.2@18050,12450
  Bottom Layer w15: DS2_SCORE.7@17800,13460 17842.5,13417.5 17842.5,12362.5 v1(17840,12360)
NetDS2_TIME_1: R16_TIME.2 TIME.1 | length 1109.1
  Top Layer w15: v1(23340,13490) 23510,13490 TIME.1@23600,13580
  Bottom Layer w15: R16_TIME.2@23300,12730 23257.5,12772.5 23257.5,13407.5 v1(23340,13490)
NetDS2_TIME_2: R17_TIME.2 TIME.2 | length 1021.1
  Top Layer w15: v1(23442.5,13402.5) 23522.5,13402.5 TIME.2@23700,13580
  Bottom Layer w15: R17_TIME.2@23400,12730 23400,12919.9 23442.5,12962.4 v1(23442.5,13402.5)
NetDS2_TIME_3: R18_TIME.2 TIME.3 | length 291.4
  Bottom Layer w15: R18_TIME.2@23500,12730 23500,12870 23600,12970 TIME.3@23600,12980
NetDS2_TIME_4: 1K.2@23600,12730 TIME.4 | length 575
  Top Layer w15: TIME.4@23400,12980 23277.5,12857.5 23277.5,12812.4 23302.4,12787.5 23542.5,12787.5 1K.2@23600,12730
NetDS2_TIME_5: R20_TIME.2 TIME.5 | length 620.7
  Top Layer w15: v1(23320,12830) 23670,12830 23700,12800 R20_TIME.2@23700,12730
  Bottom Layer w15: TIME.5@23300,12980 23300,12850 v1(23320,12830)
NetDS2_TIME_6: R21_TIME.2 TIME.6 | length 1223.1
  Top Layer w15: v1(23120,13640) 23340,13640 TIME.6@23400,13580
  Bottom Layer w15: R21_TIME.2@23100,12730 23100,13620 v1(23120,13640)
NetDS2_TIME_7: R22_TIME.2 TIME.7 | length 891.4
  Bottom Layer w15: R22_TIME.2@23200,12730 23200,13480 TIME.7@23300,13580
NetLED1_INR_2: 510.2@17070,14500 RED.2@17200,14330 | length 223.8
  Top Layer w15: 510.2@17070,14500 17200,14370 RED.2@17200,14330
NetLED2_INR_2: LED2_INR.2 R17_IN.2 | length 224.9
  Top Layer w15: R17_IN.2@17980,14490 18060,14490 18110,14440 LED2_INR.2@18110,14380 LED2_INR.2@18120,14390
NetLED3_INR_2: LED3_INR.2 R18_IN.2 | length 230.7
  Top Layer w15: R18_IN.2@18830,14480 18930,14480 18980,14430 LED3_INR.2@18980,14370
NetLED4_INR_2: LED4_INR.2 R19_in.2 | length 240.7
  Top Layer w15: R19_in.2@19720,14480 19810,14480 19860,14430 LED4_INR.2@19860,14350
NetLED5_INR_2: LED5_INR.2 R20_IN.2 | length 244.9
  Top Layer w15: R20_IN.2@20600,14480 20700,14480 20750,14430 20750,14370 LED5_INR.2@20760,14360
NetLED6_INR_2: LED6_INR.2 R21_IN.2 | length 272.4
  Top Layer w15: R21_IN.2@21550,14490 21670,14490 21700,14460 LED6_INR.2@21700,14350
NetLED7_INR_2: LED7_INR.2 R22_IN.2 | length 272.4
  Top Layer w15: R22_IN.2@22480,14500 22580,14500 22610,14470 LED7_INR.2@22610,14340
NetLED8_INR_2: LED8_INR.2 R23_IN.2 | length 286.6
  Top Layer w15: R23_IN.2@23430,14490 23550,14490 23590,14450 LED8_INR.2@23590,14340
NetLED9_ING_2: 510.2@17680,14490 GRE.2@17530,14330 | length 309
  Top Layer w15: GRE.2@17530,14330 17530,14440 17580,14490 510.2@17670,14490 ; 510.2@17670,14490 17680,14480 510.2@17670,14490
  Top Layer w20: 510.2@17680,14480 510.2@17680,14490
NetLED10_ING_2: LED10_ING.2 R25_IN.2 | length 232.4
  Top Layer w15: LED10_ING.2@18450,14380 18450,14450 18480,14480 R25_IN.2@18600,14480
NetLED11_ING_2: LED11_ING.2 R26_IN.2 | length 236.6
  Top Layer w15: LED11_ING.2@19310,14370 19310,14450 19350,14490 R26_IN.2@19450,14490
NetLED12_ING_2: LED12_ING.2 R27_IN.2 | length 250.7
  Top Layer w15: LED12_ING.2@20200,14350 20200,14440 20250,14490 R27_IN.2@20340,14490
NetLED13_ING_2: LED13_ING.2 R28_IN.2 | length 248.3
  Top Layer w15: LED13_ING.2@21100,14360 21100,14460 21120,14480 R28_IN.2@21240,14480
NetLED14_ING_2: LED14_ING.2 R29_IN.2 | length 274.9
  Top Layer w15: LED14_ING.2@22040,14350 22040,14460 22100,14520 R29_IN.2@22180,14520
NetLED15_ING_2: LED15_ING.2 R30_IN.2 | length 310.7
  Top Layer w15: LED15_ING.2@22970,14330 22970,14470 23020,14520 R30_IN.2@23120,14520
NetLED16_ING_2: LED16_ING.2 R31_IN.2 | length 312.4
  Top Layer w15: LED16_ING.2@23960,14340 23960,14490 23990,14520 R31_IN.2@24110,14520
NetLEDGREEN_CONTROL_1: 510.2@18730,9670 GRE.1@18730,9950 | length 280
  Bottom Layer w12: 510.2@18730,9670 GRE.1@18730,9950
NetLEDRED_CONTROL_1: 510.2@19730,9670 RED.1@19730,9950 | length 280
  Bottom Layer w12: 510.2@19730,9670 RED.1@19730,9950
NetQ1_ALARM_2: 2K.2 9013.2 | length 200
  Top Layer w12: 9013.2@23880,9430 2K.2@24080,9430
NetQ1_ALARM_3: 9013.3 SPEAKER.2 | length 520
  Top Layer w12: SPEAKER.2@23620,8920 v1(23780,8920)
  Bottom Layer w12: v1(23780,8920) 9013.3@23780,9280
NetR1_IN_1: R1_IN.1 S8.2 U3_IN.18 | length 5473.1
  Top Layer w15: U3_IN.18@19030,13450 19230,13450 19580,13800 v1(22860,13800)
  Bottom Layer w15: v1(22860,13800) 22863.72,13800 23198.78,14135.06 23524.94,14135.06 R1_IN.1@23560,14100 23500,14160 S8.2@23500,14720
NetR1_TIME_1: 5.1K.1@23310,10860 74LS192.9@23740,11710 SW.4@23450,10850 | length 1247.3
  Top Layer w12: 5.1K.1@23310,10860 23440,10860 SW.4@23450,10850
  Bottom Layer w12: SW.4@23450,10850 23660,10850 23694.47,10884.47 23694.47,11094.47 23694.47,11428.86 23740,11474.39 74LS192.9@23740,11710
NetR2_IN_1: R2_IN.1 S7.2 U3_IN.17 | length 7299.1
  Top Layer w12: v1(18840,13350) U3_IN.17@19030,13350 ; v1(18851,12341) 18861,12351 19831.02,12351 19833.02,12349 19866.98,12349 19947.98,12430 v1(22560,12430)
  Bottom Layer w12: v1(18840,13350) 18840,12497.98 18851,12486.98 v1(18851,12341) ; v1(22560,12430) 22560,14020 R2_IN.1@22620,14080
  Bottom Layer w15: S7.2@22540,14720 22540,14160 R2_IN.1@22620,14080
NetR2_TIME_1: 74LS192.10@23640,11710 R2_TIME.1 SW.3@23450,10950 | length 982.8
  Top Layer w12: R2_TIME.1@23310,10960 23440,10960 SW.3@23450,10950
  Bottom Layer w12: SW.3@23450,10950 23495.53,10995.53 23495.53,11031.14 23495.53,11301.14 23585.53,11391.14 23585.53,11655.53 74LS192.10@23640,11710
NetR3_IN_1: R3_IN.1 S6.2 U3_IN.14 | length 5096.1
  Top Layer w15: v1(19145,14530) 19150.06,14535.06 21444.94,14535.06 21504.94,14475.06 21504.94,14471.34 21610,14366.28 21610,14130 R3_IN.1@21680,14060
  Bottom Layer w15: U3_IN.14@19030,13050 19030,13081.41 19078.5,13129.91 19078.5,13821.4 19067.5,13832.4 19067.5,13867.6 19122.5,13922.6 19122.5,14507.5 v1(19145,14530) ; S6.2@21620,14720 21620,14120 R3_IN.1@21680,14060
NetR3_TIME_1: 74LS192.1@23040,11410 R3_TIME.1 SW.2@23450,11050 | length 752.4
  Top Layer w12: R3_TIME.1@23310,11060 23440,11060 SW.2@23450,11050
  Bottom Layer w12: 74LS192.1@23040,11410 23040,11330 23040,11080 23060,11060 R3_TIME.1@23310,11060
NetR4_CONTROL_2: 5.1k.2@19720,9460 S_SATA.2 U1_CONTROL.6 | length 1354.1
  Top Layer w20: v1(19480,9460) 5.1k.2@19720,9460
  Bottom Layer w12: v1(19480,9460) U1_CONTROL.6@19480,10320
  Bottom Layer w20: S_SATA.2@19715,8725 S_SATA.2@19720,8720 ; S_SATA.2@19715,9215 S_SATA.2@19720,9220 5.1k.2@19720,9460
NetR4_IN_1: R4_IN.1 S5.2 U3_IN.13 | length 3448
  Top Layer w15: v1(19110,13850) v1(20670,13850)
  Bottom Layer w15: U3_IN.13@19030,12950 19110,13030 v1(19110,13850) ; v1(20670,13850) 20670,14110 ; S5.2@20670,14720 20670,14110 ; R4_IN.1@20730,14050 20670,14110
NetR4_TIME_1: 74LS192.15@23140,11710 R4_TIME.1 SW.1@23450,11150 | length 823.1
  Top Layer w12: R4_TIME.1@23310,11150 SW.1@23450,11150
  Bottom Layer w12: 74LS192.15@23140,11710 23190,11660 23190,11180 23220,11150 R4_TIME.1@23310,11150
NetR5_IN_1: R5_IN.1 S4.2 U3_IN.8 | length 3889.6
  Top Layer w15: v1(18810,12470) v1(19820,12470)
  Bottom Layer w15: U3_IN.8@18730,12950 18681.5,12901.5 18681.5,12538.4 18749.9,12470 v1(18810,12470) ; S4.2@19780,14720 19780,14090 R5_IN.1@19820,14050 19800,14030 19800,13934.16 19790.47,13924.63 19790.47,12844.98 19820,12815.45 v1(19820,12470)
NetR5_SCORE_1: 5.1k.1@18230,10480 S2_SCORE.8 U2_SCORE.9 | length 1974.9
  Top Layer w12: v1(17790,10480) 5.1k.1@18230,10480 ; v1(18230,10920) v1(18490,10920)
  Bottom Layer w12: S2_SCORE.8@17790,10180 v1(17790,10480) ; 5.1k.1@18230,10480 v1(18230,10920) ; v1(18490,10920) 18495.53,10925.53 18495.53,11375.53 U2_SCORE.9@18550,11430
NetR5_TIME_1: 74LS192.9@24750,11700 R5_TIME.1 SW.4@24460,10850 | length 1223.1
  Top Layer w12: R5_TIME.1@24330,10850 SW.4@24460,10850 v1(24670,10850)
  Bottom Layer w12: v1(24670,10850) 24700,10880 24700,10993.13 24700,11090 24700,11650 74LS192.9@24750,11700
NetR6_ALARM_1: 100.1 SPEAKER.1 | length 220
  Bottom Layer w12: SPEAKER.1@23520,8920 100.1@23520,9140
NetR6_IN_1: R6_IN.1 S3.2 U3_IN.7 | length 2114.3
  Top Layer w15: v1(18560,13980) 18880,13980 R6_IN.1@18950,14050
  Bottom Layer w15: v1(18560,13980) 18560,13220 U3_IN.7@18730,13050 ; S3.2@18890,14720 18890,14110 R6_IN.1@18950,14050
NetR6_SCORE_1: R6_SCORE.1 S2_SCORE.7 U2_SCORE.10 | length 1769
  Top Layer w12: v1(17890,10370) 17900,10380 R6_SCORE.1@18230,10380 v1(18390,10380)
  Bottom Layer w12: S2_SCORE.7@17890,10180 v1(17890,10370) ; v1(18390,10380) 18395.53,10385.53 18395.53,11375.53 U2_SCORE.10@18450,11430
NetR6_TIME_1: 74LS192.10@24650,11700 R6_TIME.1 SW.3@24460,10950 | length 1040.1
  Top Layer w12: R6_TIME.1@24330,10950 SW.3@24460,10950 24598.89,10950 v1(24604.44,10955.56)
  Bottom Layer w12: v1(24604.44,10955.56) 24604.44,11094.44 24604.44,11654.44 74LS192.10@24650,11700
NetR7_ALARM_1: 2K.1 74LS20.6 | length 210
  Top Layer w12: 2K.1@24080,9030 74LS20.6@24290,9030
NetR7_IN_1: R7_IN.1 S2.2 U3_IN.4 | length 1867.5
  Top Layer w15: v1(18382.5,13357.5) 18722.5,13357.5 U3_IN.4@18730,13350
  Bottom Layer w15: S2.2@18040,14720 18040,14130 R7_IN.1@18090,14080 18382.5,13787.5 18382.5,13490 ; v1(18382.5,13357.5) 18382.5,13490 ; 18382.5,13477.5 18382.5,13490
NetR7_SCORE_1: R7_SCORE.1 S2_SCORE.6 U2_SCORE.1 | length 1248
  Top Layer w12: v1(17990,10280) R7_SCORE.1@18230,10280
  Bottom Layer w12: U2_SCORE.1@17850,11130 17990,10990 v1(17990,10280) S2_SCORE.6@17990,10180
NetR7_TIME_1: 74LS192.1@24050,11400 R7_TIME.1 SW.2@24460,11050 | length 760
  Top Layer w12: v1(24050,11050) R7_TIME.1@24330,11050 SW.2@24460,11050
  Bottom Layer w12: v1(24050,11050) 24050,11330 74LS192.1@24050,11400
NetR8_IN_1: 5.1k.1@17180,14090 S1.2 U3_IN.3 | length 2731.1
  Top Layer w15: v1(17270,13790) v1(18640,13790)
  Bottom Layer w15: S1.2@17140,14720 17140,14130 5.1k.1@17180,14090 17270,14000 v1(17270,13790) ; v1(18640,13790) 18681.5,13748.5 18681.5,13529.91 18730,13481.41 U3_IN.3@18730,13450